# EAGLE board CR1000X (EAGLE 9.6.2)
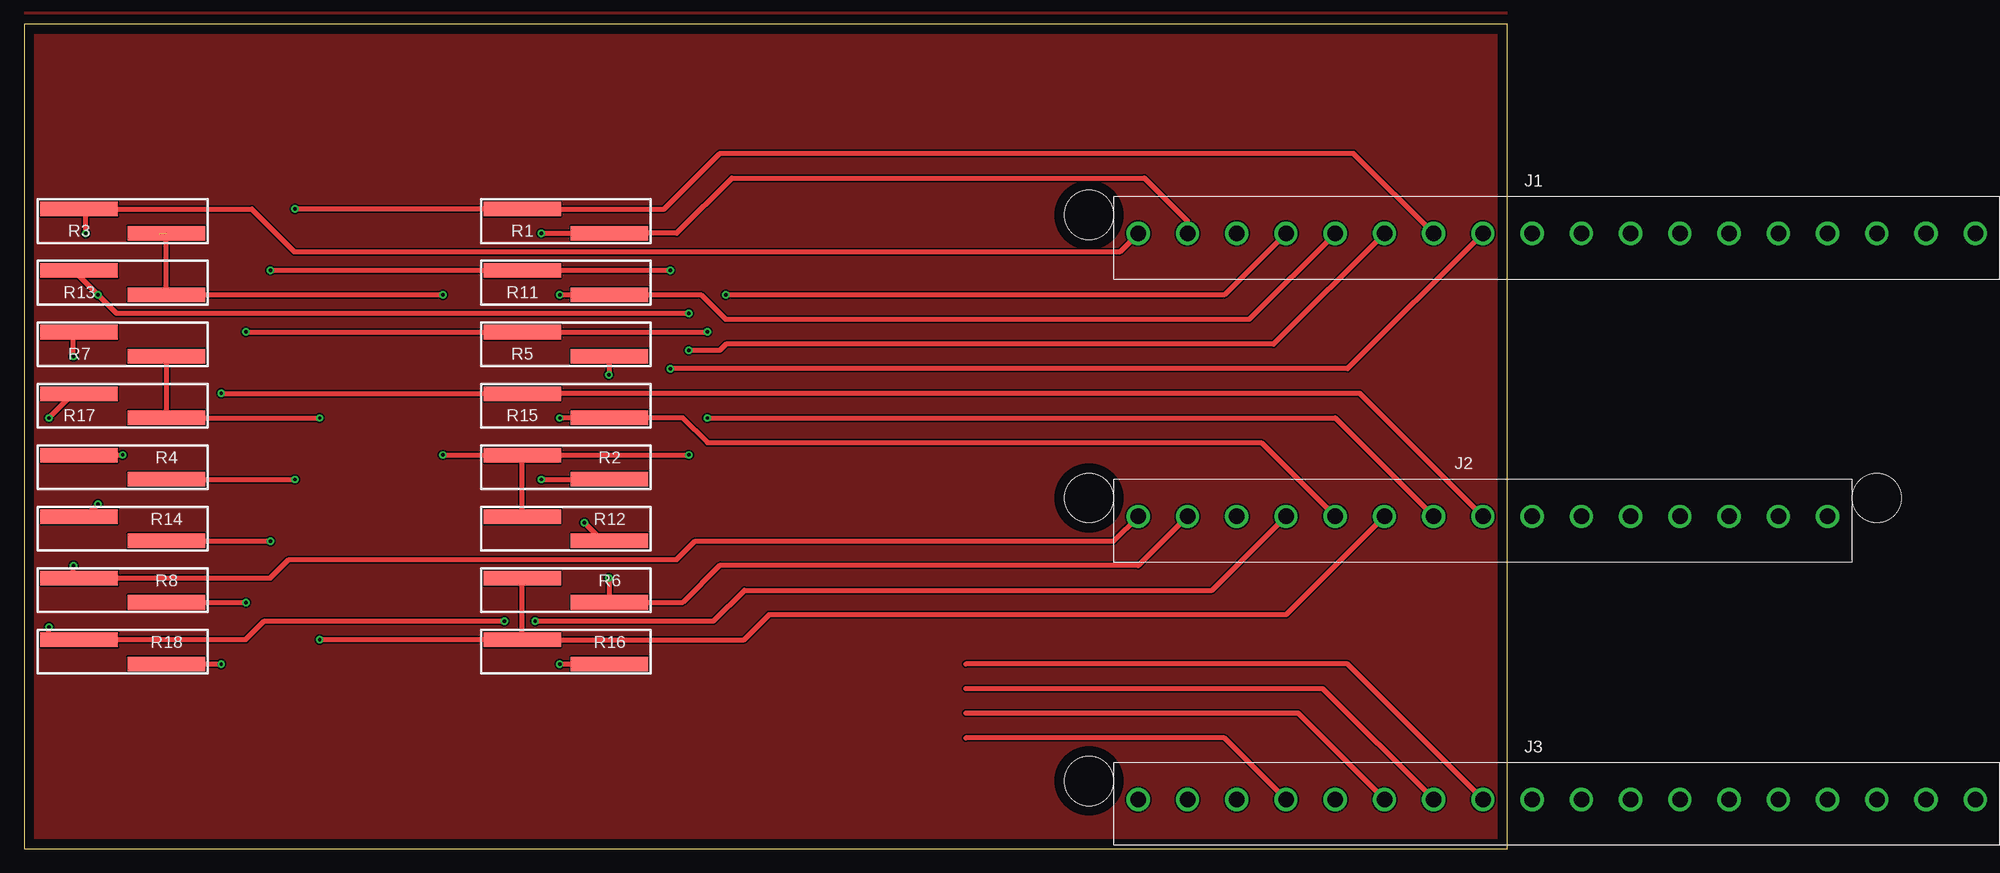
[diagram p0: board, top side]
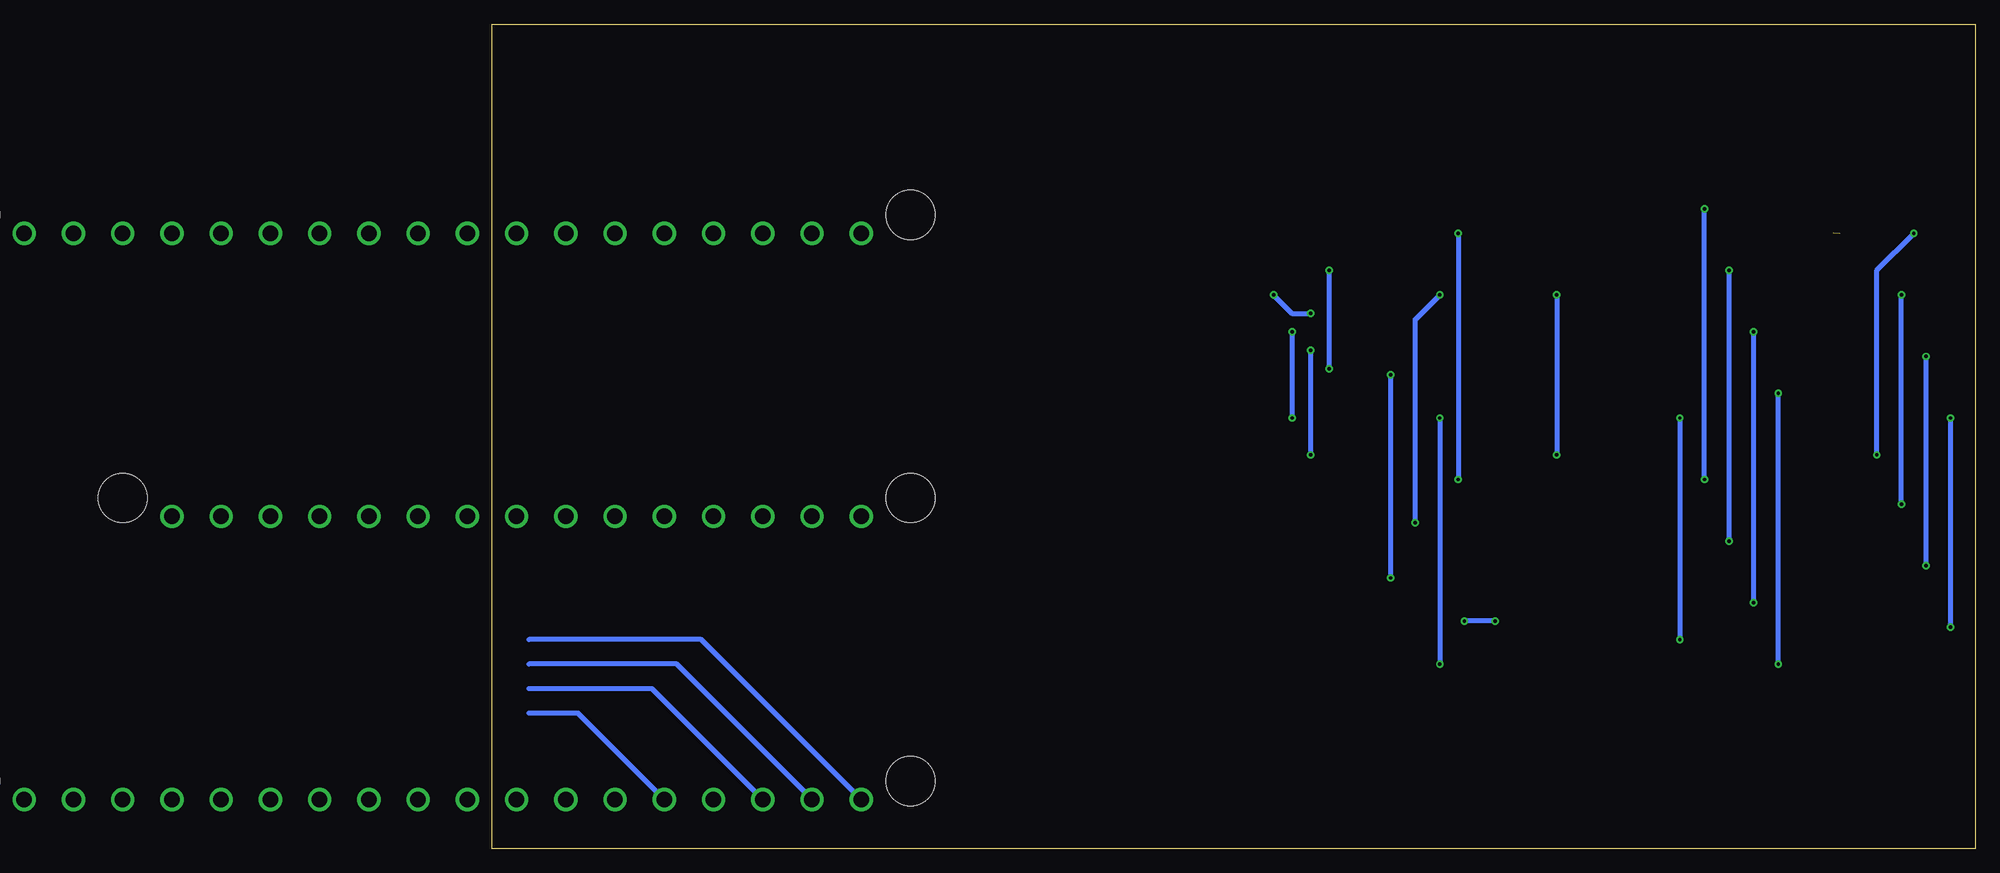
[diagram p1: board, bottom side, seen from below]

Size 153.03 x 85.09 mm. Coordinates in mm from the lower left corner, seen from the top.
Outline: 0,0 153.03,0 153.03,85.09 0,85.09 0,0
Copper layers (1*16): Top 0.035mm / dielectric 1.5mm / Bottom 0.035mm
Design rules "default": minimum track width 6mil, minimum drill 0.35mm, track to track 6mil, track to pad 6mil, pad to pad 6mil, via to via 6mil, smd to smd 6mil, copper to edge 40mil, drill to drill 6mil, minimum pad ring 10mil, minimum via ring 8mil, stop-mask expansion 4mil, vias tented up to drill 0mil, thermal gap 10mil
Holes 5.08 mm at 109.86,6.99 109.86,36.2 109.86,65.41 206.38,6.99 191.13,36.2 206.38,65.41

## Footprints (pad centres in the part's own frame; a part is rotated, then mirrored left to right if it is on the bottom)
691311500018 = drill 1.6: 1 -43.18,0; 2 -38.1,0; 3 -33.02,0; 4 -27.94,0; 5 -22.86,0; 6 -17.78,0; 7 -12.7,0; 8 -7.62,0; 9 -2.54,0; 10 2.54,0; 11 7.62,0; 12 12.7,0; 13 17.78,0; 14 22.86,0; 15 27.94,0; 16 33.02,0; 17 38.1,0; 18 43.18,0
691311500015 = drill 1.6: 1 -35.56,0; 2 -30.48,0; 3 -25.4,0; 4 -20.32,0; 5 -15.24,0; 6 -10.16,0; 7 -5.08,0; 8 0,0; 9 5.08,0; 10 10.16,0; 11 15.24,0; 12 20.32,0; 13 25.4,0; 14 30.48,0; 15 35.56,0
STRAIN_GAUGE = smd 1.5 x 8: 1 -1.25,-4.5; 2 1.25,4.5

## Placement (x,y rotation side)
J1  [691311500018]  158.12,63.5 0 top
J2  [691311500015]  150.5,34.29 0 top
J3  [691311500018]  158.12,5.08 0 top
R1  STRAIN_GAUGE-5  [STRAIN_GAUGE]  55.88,64.77 270 top
R2  STRAIN_GAUGE-5  [STRAIN_GAUGE]  55.88,39.37 90 top
R3  STRAIN_GAUGE-5  [STRAIN_GAUGE]  10.16,64.77 270 top
R4  STRAIN_GAUGE-5  [STRAIN_GAUGE]  10.16,39.37 90 top
R5  STRAIN_GAUGE-5  [STRAIN_GAUGE]  55.88,52.07 270 top
R6  STRAIN_GAUGE-5  [STRAIN_GAUGE]  55.88,26.67 90 top
R7  STRAIN_GAUGE-5  [STRAIN_GAUGE]  10.16,52.07 270 top
R8  STRAIN_GAUGE-5  [STRAIN_GAUGE]  10.16,26.67 90 top
R11  STRAIN_GAUGE-5  [STRAIN_GAUGE]  55.88,58.42 270 top
R12  STRAIN_GAUGE-5  [STRAIN_GAUGE]  55.88,33.02 90 top
R13  STRAIN_GAUGE-5  [STRAIN_GAUGE]  10.16,58.42 270 top
R14  STRAIN_GAUGE-5  [STRAIN_GAUGE]  10.16,33.02 90 top
R15  STRAIN_GAUGE-5  [STRAIN_GAUGE]  55.88,45.72 270 top
R16  STRAIN_GAUGE-5  [STRAIN_GAUGE]  55.88,20.32 90 top
R17  STRAIN_GAUGE-5  [STRAIN_GAUGE]  10.16,45.72 270 top
R18  STRAIN_GAUGE-5  [STRAIN_GAUGE]  10.16,20.32 90 top

## Library data of the parts
J1-J3 = Wurth_Elektronik_Electromechanic_Terminal_Blocks_Connectors_rev19d
R1-R8 R11-R18 = Wheatstone

## Nets
1H: J1.1 R3.1 R4.2
1L: J1.2 R1.2 R2.1
2H: J1.4 R13.1 R14.2
2L: J1.5 R11.2 R12.1
3H: J1.10
3L: J1.11
4H: J1.13
4L: J1.14
5H: J2.1 R7.1 R8.2
5L: J2.2 R5.2 R6.1
5V: J3.1
6H: J2.4 R17.1 R18.2
6L: J2.5 R15.2 R16.1
7H: J2.10
7L: J2.11
8H: J2.13
8L: J2.14
12V: J3.5
C1: J3.7
C2: J3.8
C3: J3.9
C4: J3.10
C5: J3.12
C6: J3.13
C7: J3.15
C8: J3.16
G1: J3.2
G2: J3.6
G3: J3.11
G4: J3.18
P1: J1.16
P2: J1.18
RG1: J3.14
RG2: J3.17
SG1: J1.3
SG2: J1.6 R2.2 R3.2 R12.2 R13.2
SG3: J1.12
SG4: J1.15
SG5: J2.3
SG6: J2.6 R6.2 R7.2 R16.2 R17.2
SG7: J2.12
SG8: J2.15
SGP: J1.17
SGVX12: J1.9
SGVX34: J2.9
SW12-1: J3.3
SW12-2: J3.4
VX1: J1.7 R1.1 R4.1
VX2: J1.8 R11.1 R14.1
VX3: J2.7 R5.1 R8.1
VX4: J2.8 R15.1 R18.1

## Tracks (layer width: path | path; a pad name or v marks a point on that pad's centre or on a via)
1H  (via drill 0.35)
  Top 0.508: J1.1 113.03,61.59 27.9,61.59 23.48,66.02 R3.1 6.35,65.33 v6.35,63.5 | R4.2 5.68,40.64 v10.16,40.64
  Bottom 0.508: v10.16,40.64 10.16,59.69 v6.35,63.5
1L  (via drill 0.35)
  Top 0.508: J1.2 120.02,64.77 115.57,69.22 73.03,69.22 67.33,63.52 R1.2 60.36,63.5 v53.34,63.5 | v53.34,38.1 53.36,38.12 R2.1
  Bottom 0.508: v53.34,63.5 v53.34,38.1
2H  (via drill 0.35)
  Top 0.508: J1.4 123.83,57.15 v72.39,57.15 | R14.2 6.33,34.27 v7.62,35.56 | R13.1 5.66,59.11 v7.62,57.15 9.53,55.24 v68.58,55.24
  Bottom 0.508: v7.62,35.56 v7.62,57.15 | v72.39,57.15 70.48,55.24 v68.58,55.24
2L  (via drill 0.35)
  Top 0.508: J1.5 126.37,54.61 72.39,54.61 69.83,57.17 R11.2 | 59.71,57.17 R11.2 | R12.1 59.67,31.77 v57.79,33.66 | v55.25,57.15 55.27,57.17 R11.2
  Bottom 0.508: v57.79,33.66 57.79,54.61 v55.25,57.15
5H  (via drill 0.35)
  Top 0.508: J2.1 112.39,31.75 69.22,31.75 67.31,29.84 27.31,29.84 25.4,27.94 5.68,27.94 R8.2 5.08,28.5 v5.08,29.21 | v5.08,50.8 5.08,52.74 R7.1
  Bottom 0.508: v5.08,29.21 v5.08,50.8
5L  (via drill 0.35)
  Top 0.508: J2.2 114.94,29.21 71.75,29.21 67.97,25.42 R6.1 60.33,25.48 v60.33,27.94 | v60.33,48.89 60.38,48.95 R5.2
  Bottom 0.508: v60.33,48.89 v60.33,27.94
5V
  Bottom 0.508: J3.1 131.44,21.59 149.22,21.59
6H  (via drill 0.35)
  Top 0.508: J2.4 122.56,26.67 74.3,26.67 71.12,23.49 v52.71,23.49 | v2.54,22.86 2.54,21.59 2.56,21.57 R18.2 5.68,21.59 22.86,21.59 24.77,23.49 v49.53,23.49 | v2.54,44.45 5.06,46.97 R17.1
  Bottom 0.508: v2.54,22.86 v2.54,44.45 | v49.53,23.49 v52.71,23.49
6L  (via drill 0.35)
  Top 0.508: J2.5 127.64,41.91 70.48,41.91 67.93,44.47 R15.2 60.36,44.45 v55.25,44.45 | v55.25,19.05 55.27,19.07 R16.1
  Bottom 0.508: v55.25,44.45 v55.25,19.05
12V
  Bottom 0.508: J3.5 144.15,13.97 149.22,13.97
C1
  Top 0.508: J3.7 133.99,16.51 97.16,16.51
C2
  Top 0.508: J3.8 136.53,19.05 97.16,19.05
G1
  Bottom 0.508: J3.2 133.99,19.05 149.22,19.05
G2
  Top 0.508: J3.6 131.44,13.97 97.16,13.97
GND
  pour Top: 0,86.36 0,0 153.03,0 153.03,86.36
SG2  (via drill 0.35)  (1 unrouted)
  Top 0.508: J1.6 128.91,52.07 72.39,52.07 71.75,51.43 v68.58,51.43 | R13.2 14.66,62.81 13.97,63.5 | R2.2 R12.2 51.36,34.29 | R2.2 51.4,40.64 v68.58,40.64 | 14.68,57.15 R13.2 | R13.2 43.16,57.17 v43.18,57.15 | v43.18,40.64 51.36,40.64 R2.2
  Bottom 0.508: v43.18,57.15 v43.18,40.64 | v68.58,51.43 v68.58,40.64
SG6  (via drill 0.35)
  Top 0.508: J2.6 130.18,24.13 76.84,24.13 74.28,21.57 R16.2 | R7.2 R17.2 | R16.2 R6.2 | R6.2 51.4,27.94 | 14.68,44.45 R17.2 | R17.2 30.46,44.47 v30.48,44.45 | 51.36,27.94 R6.2 | v30.48,21.59 51.36,21.59 R16.2
  Bottom 0.508: v30.48,44.45 v30.48,21.59
SW12-1
  Bottom 0.508: J3.3 136.53,16.51 149.22,16.51
SW12-2
  Top 0.508: J3.4 123.83,11.43 97.16,11.43
VX1  (via drill 0.35)
  Top 0.508: 51.36,66.04 R1.1 | R1.1 51.4,66.04 v27.94,66.04 | R4.1 27.92,38.12 v27.94,38.1 | J1.7 137.16,71.75 71.75,71.75 66.02,66.02 R1.1
  Bottom 0.508: v27.94,38.1 v27.94,66.04
VX2  (via drill 0.35)
  Top 0.508: J1.8 136.53,49.53 v66.68,49.53 | R14.1 25.38,31.77 v25.4,31.75 | v25.4,59.69 51.36,59.69 R11.1 51.4,59.69 v66.68,59.69
  Bottom 0.508: v25.4,31.75 v25.4,59.69 | v66.68,59.69 v66.68,49.53
VX3  (via drill 0.35)
  Top 0.508: J2.7 135.25,44.45 v70.48,44.45 | R8.1 22.84,25.42 v22.86,25.4 | v22.86,53.34 51.36,53.34 R5.1 51.4,53.34 v70.48,53.34
  Bottom 0.508: v22.86,25.4 v22.86,53.34 | v70.48,53.34 v70.48,44.45
VX4  (via drill 0.35)
  Top 0.508: J2.8 137.8,46.99 51.4,46.99 | 51.36,46.99 R15.1 51.4,46.99 | R18.1 20.3,19.07 v20.32,19.05 | v20.32,46.99 51.4,46.99
  Bottom 0.508: v20.32,19.05 v20.32,46.99